# EAGLE board CT_schematic (EAGLE 7.6.0)

Size 100 x 80 mm. Coordinates in mm from the lower left corner, seen from the top.
Outline: 0,0 100,0 100,80 0,80 0,0
Copper layers (1*16): Top 0.035mm / dielectric 1.5mm / Bottom 0.035mm
Design rules "default": minimum track width 10mil, minimum drill 24mil, track to track 8mil, track to pad 8mil, pad to pad 8mil, via to via 8mil, smd to smd 8mil, copper to edge 40mil, drill to drill 8mil, minimum pad ring 10mil, minimum via ring 8mil, stop-mask expansion 4mil, vias tented up to drill 0mil, thermal gap 10mil

## Footprints (pad centres in the part's own frame; a part is rotated, then mirrored left to right if it is on the bottom)
C0603 = smd 0.8 x 0.8: 1 -0.762,0; 2 0.762,0
C0402 = smd 0.5 x 0.5: 1 -0.508,0; 2 0.508,0
C0805 = smd 1.2 x 1.3: 1 -1.016,0; 2 1.016,0
C1210 = smd 1.2 x 2.5: 1 -1.524,0; 2 1.524,0
2220 = smd 1.85 x 5.5: 1 -2.55,0; 2 2.55,0
EXV-9H = smd 3.505 x 1.676: 1 -2.857,0; 2 2.857,0
L0603 = smd 0.8 x 0.8: 1 -0.762,0; 2 0.762,0
R0603 = smd 0.8 x 0.8: 1 -0.762,0; 2 0.762,0
DR1040 = smd 1.6 x 3.2: 1 -4.458,0; 2 4.458,0
PJ-037B_PACKAGE = drill 3.7 square: 1 12,0 | drill 3.2 square: 2 6,0
LQFP144 = smd 0.35 x 1.35: 1 -8.75,-10.625; 2 -8.25,-10.625; 3 -7.75,-10.625; 4 -7.25,-10.625; 5 -6.75,-10.625; 6 -6.25,-10.625; 7 -5.75,-10.625; 8 -5.25,-10.625; 9 -4.75,-10.625; 10 -4.25,-10.625; 11 -3.75,-10.625; 12 -3.25,-10.625; 13 -2.75,-10.62; 14 -2.25,-10.625; 15 -1.75,-10.625; 16 -1.25,-10.625; 17 -0.75,-10.625; 18 -0.25,-10.625; 19 0.25,-10.625; 20 0.75,-10.625; 21 1.25,-10.625; 22 1.75,-10.625; 23 2.25,-10.625; 24 2.75,-10.62; 25 3.25,-10.625; 26 3.75,-10.625; 27 4.25,-10.625; 28 4.75,-10.625; 29 5.25,-10.625; 30 5.75,-10.625; 31 6.25,-10.625; 32 6.75,-10.625; 33 7.25,-10.625; 34 7.75,-10.625; 35 8.25,-10.625; 36 8.75,-10.625; 73 8.75,10.625; 74 8.25,10.625; 75 7.75,10.625; 76 7.25,10.625; 77 6.75,10.625; 78 6.25,10.625; 79 5.75,10.625; 80 5.25,10.625; 81 4.75,10.625; 82 4.25,10.625; 83 3.75,10.625; 84 3.25,10.625; 85 2.75,10.625; 86 2.25,10.625; 87 1.75,10.625; 88 1.25,10.625; 89 0.75,10.625; 90 0.25,10.625; 91 -0.25,10.625; 92 -0.75,10.625; 93 -1.25,10.625; 94 -1.75,10.625; 95 -2.25,10.625; 96 -2.75,10.625; 97 -3.25,10.625; 98 -3.75,10.625; 99 -4.25,10.625; 100 -4.75,10.625; 101 -5.25,10.625; 102 -5.75,10.625; 103 -6.25,10.625; 104 -6.75,10.625; 105 -7.25,10.625; 106 -7.75,10.625; 107 -8.25,10.625; 108 -8.75,10.625 | smd 1.35 x 0.35: 37 10.625,-8.75; 38 10.625,-8.25; 39 10.625,-7.75; 40 10.625,-7.25; 41 10.625,-6.75; 42 10.625,-6.25; 43 10.625,-5.75; 44 10.625,-5.25; 45 10.625,-4.75; 46 10.625,-4.25; 47 10.625,-3.75; 48 10.625,-3.25; 49 10.625,-2.75; 50 10.625,-2.25; 51 10.625,-1.75; 52 10.625,-1.25; 53 10.625,-0.75; 54 10.625,-0.25; 55 10.625,0.25; 56 10.625,0.75; 57 10.625,1.25; 58 10.625,1.75; 59 10.625,2.25; 60 10.625,2.75; 61 10.625,3.25; 62 10.625,3.75; 63 10.625,4.25; 64 10.625,4.75; 65 10.625,5.25; 66 10.625,5.75; 67 10.625,6.25; 68 10.625,6.75; 69 10.625,7.25; 70 10.625,7.75; 71 10.625,8.25; 72 10.625,8.75; 109 -10.625,8.75; 110 -10.625,8.25; 111 -10.625,7.75; 112 -10.625,7.25; 113 -10.625,6.75; 114 -10.625,6.25; 115 -10.625,5.75; 116 -10.625,5.25; 117 -10.625,4.75; 118 -10.625,4.25; 119 -10.625,3.75; 120 -10.625,3.25; 121 -10.625,2.75; 122 -10.625,2.25; 123 -10.625,1.75; 124 -10.625,1.25; 125 -10.625,0.75; 126 -10.625,0.25; 127 -10.625,-0.25; 128 -10.625,-0.75; 129 -10.625,-1.25; 130 -10.625,-1.75; 131 -10.625,-2.25; 132 -10.625,-2.75; 133 -10.625,-3.25; 134 -10.625,-3.75; 135 -10.625,-4.25; 136 -10.625,-4.75; 137 -10.625,-5.25; 138 -10.625,-5.75; 139 -10.625,-6.25; 140 -10.625,-6.75; 141 -10.625,-7.25; 142 -10.625,-7.75; 143 -10.625,-8.25; 144 -10.625,-8.75
SOT-23-6 = smd 1.1 x 0.6: 1 -1.4,0.95; 2 -1.4,0; 3 -1.4,-0.95; 4 1.4,-0.95; 5 1.4,0; 6 1.4,0.95
ARDUCAM = drill 1 pad 1.8 square: 1 0,0 | drill 1 pad 1.8: 2 0,2.54; 3 2.54,0; 4 2.54,2.54; 5 5.08,0; 6 5.08,2.54; 7 7.62,0; 8 7.62,2.54; 9 10.16,0; 10 10.16,2.54; 11 12.7,0; 12 12.7,2.54; 13 15.24,0; 14 15.24,2.54; 15 17.78,0; 16 17.78,2.54; 17 20.32,0; 18 20.32,2.54; 19 22.86,0; 20 22.86,2.54
QFN-32 = smd 0.6 x 0.3: 1 -2.3,1.75; 2 -2.3,1.25; 3 -2.3,0.75; 4 -2.3,0.25; 5 -2.3,-0.25; 6 -2.3,-0.75; 7 -2.3,-1.25; 8 -2.3,-1.75; 17 2.3,-1.75; 18 2.3,-1.25; 19 2.3,-0.75; 20 2.3,-0.25; 21 2.3,0.25; 22 2.3,0.75; 23 2.3,1.25; 24 2.3,1.75 | smd 0.3 x 0.6: 9 -1.75,-2.3; 10 -1.25,-2.3; 11 -0.75,-2.3; 12 -0.25,-2.3; 13 0.25,-2.3; 14 0.75,-2.3; 15 1.25,-2.3; 16 1.75,-2.3; 25 1.75,2.3; 26 1.25,2.3; 27 0.75,2.3; 28 0.25,2.3; 29 -0.25,2.3; 30 -0.75,2.3; 31 -1.25,2.3; 32 -1.75,2.3 | smd 3.2 x 3.2: EXP 0,0
7498011122R = smd 0.71 x 2.29: 1 -3.545,-3.18; 2 -2.525,-3.18; 3 -1.505,-3.18; 4 -0.485,-3.18; 5 0.535,-3.18; 6 1.555,-3.18; 8 3.595,-3.18; 9 5.635,-3.18; 10 6.655,-3.18; 11 -6.605,-3.18; 12 -5.585,-3.18 | smd 1.4 x 2.54: 13 -8.51,10.2; 14 8.51,10.2 | hole 1.4: -3.5,0; 3.5,0
DFN8-S = smd 0.6 x 0.4: 1 -2.69,1.905; 2 -2.69,0.635; 3 -2.69,-0.635; 4 -2.69,-1.905; 5 2.69,-1.905; 6 2.69,-0.635; 7 2.69,0.635; 8 2.69,1.905
USB-A-H = drill 0.914: 1 2.718,3.493; 2 2.718,1.003; 3 2.718,-1.003; 4 2.718,-3.493 | drill 2.311: 5 0,-6.566; 6 0,6.566
SOT143B = smd 1 x 0.7: 1 -0.75,-1 | smd 0.6 x 0.7: 2 0.95,-1; 3 0.95,1; 4 -0.95,1
QFN-28 = smd 0.813 x 0.305: 1 -2.451,1.5; 2 -2.451,1; 3 -2.451,0.5; 4 -2.451,0; 5 -2.451,-0.5; 6 -2.451,-1; 7 -2.451,-1.5; 15 2.451,-1.5; 16 2.451,-1; 17 2.451,-0.5; 18 2.451,0; 19 2.451,0.5; 20 2.451,1; 21 2.451,1.5 | smd 0.305 x 0.813: 8 -1.5,-2.451; 9 -1,-2.451; 10 -0.5,-2.451; 11 0,-2.451; 12 0.5,-2.451; 13 1,-2.451; 14 1.5,-2.451; 22 1.5,2.451; 23 1,2.451; 24 0.5,2.451; 25 0,2.451; 26 -0.5,2.451; 27 -1,2.451; 28 -1.5,2.451 | smd 3.607 x 3.607: 29 0,0
SJ-43515TS-SMT-TR = smd 2.2 x 3: 1 0.6,-7.4; 4 3.4,-7.4 | smd 3 x 3: 2 12.8,-7.4; 5 17,-3 | smd 2 x 3: 3 5.3,0; 6 2.5,0 | drill 1.8: P$7 4.5,-3.69; P$8 11.54,-3.69
ABLS-25.000MHZ-B2F-T = smd 5.6 x 2.8: 1 -3.81,0; 2 5.69,0
ASEK = smd 1.4 x 1: 1 -1.1,-0.8; 2 1.1,-0.8; 3 1.1,0.8; 4 -1.1,0.8
ASFL1 = smd 1.7 x 1.5: 1 -1.27,-1.1; 2 1.27,-1.1; 3 1.27,1.1; 4 -1.27,1.1
IDT74FCT38072 = smd 0.51 x 1: 1 0,0; 2 1.27,0; 3 2.54,0; 4 3.81,0; 5 3.81,4.95; 6 2.54,4.95; 7 1.27,4.95; 8 0,4.95
QFN-16_EP = smd 0.805 x 0.3: 1 -1.452,0.75; 2 -1.452,0.25; 3 -1.452,-0.25; 4 -1.452,-0.75; 9 1.452,-0.75; 10 1.452,-0.25; 11 1.452,0.25; 12 1.452,0.75 | smd 0.3 x 0.805: 5 -0.75,-1.452; 6 -0.25,-1.452; 7 0.25,-1.452; 8 0.75,-1.452; 13 0.75,1.452; 14 0.25,1.452; 15 -0.25,1.452; 16 -0.75,1.452 | smd 1.55 x 1.55: 17 0,0
WSON-8 = smd 0.3 x 0.6: 1 -0.75,0; 2 0.05,0; 3 0.85,0; 4 1.65,0; 5 1.65,3.8; 6 0.85,3.8; 7 0.05,3.8; 8 -0.75,3.8 | smd 3 x 2.6: PAD 0.45,1.9
SON-6 = smd 0.55 x 0.3: 1 -0.355,0.5 | smd 0.52 x 0.3: 2 -0.37,0; 3 -0.37,-0.5; 4 0.37,-0.5; 5 0.37,0; 6 0.37,0.5
SW_4-1437565-2 = smd 1.4 x 2.1: 1 -2.23,4.55; 2 -2.23,-4.55; 3 2.23,4.55; 4 2.23,-4.55
LGM67K-G1J2-24-Z = smd 0.8 x 1.4: A -2,0; C 0,0
NC7SZ125M5X = smd 1.3 x 0.7: 1 -1.3,0.95; 2 -1.3,0; 3 -1.3,-0.95; 4 1.3,-0.95; 5 1.3,0.95

## Placement (x,y rotation side)
C1  1e-06  [C0603]  -19.05,93.98 0 top  (outside the outline)
C2  1e-07  [C0603]  -22.86,93.98 0 top  (outside the outline)
C3  1e-07  [C0603]  -26.67,93.98 0 top  (outside the outline)
C4  1e-07  [C0603]  -30.48,93.98 0 top  (outside the outline)
C5  1e-07  [C0603]  -34.29,93.98 0 top  (outside the outline)
C6  1e-07  [C0603]  -38.1,93.98 0 top  (outside the outline)
C7  1e-07  [C0603]  -41.91,93.98 0 top  (outside the outline)
C8  1e-07  [C0603]  -45.72,93.98 0 top  (outside the outline)
C9  1e-07  [C0603]  -49.53,93.98 0 top  (outside the outline)
C10  1e-07  [C0603]  -53.34,93.98 0 top  (outside the outline)
C11  1e-07  [C0603]  -57.15,93.98 0 top  (outside the outline)
C12  1e-07  [C0603]  -60.96,93.98 0 top  (outside the outline)
C13  1e-07  [C0603]  -64.77,93.98 0 top  (outside the outline)
C14  4.7e-06  [C0603]  -85.09,88.9 0 top  (outside the outline)
C15  2.2e-09  [C0603]  -88.9,88.9 0 top  (outside the outline)
C16  2.2e-09  [C0603]  -92.71,88.9 0 top  (outside the outline)
C17  1e-08  [C0603]  -68.58,93.98 0 top  (outside the outline)
C18  1e-06  [C0603]  -72.39,93.98 0 top  (outside the outline)
C19  1e-11  [C0402]  -30.48,104.14 0 top  (outside the outline)
C20  1e-11  [C0402]  -34.29,104.14 0 top  (outside the outline)
C21  1e-06  [C0603]  -76.2,93.98 0 top  (outside the outline)
C22  1e-07  [C0402]  -38.1,104.14 0 top  (outside the outline)
C23  1e-07  [C0402]  -41.91,104.14 0 top  (outside the outline)
C24  2.2e-06  [C0603]  -15.24,93.98 0 top  (outside the outline)
C25  1e-07  [C0402]  -45.72,104.14 0 top  (outside the outline)
C26  1e-07  [C0402]  -49.53,104.14 0 top  (outside the outline)
C27  1e-05  [C0805]  -34.29,83.82 0 top  (outside the outline)
C28  1e-07  [C0402]  -53.34,104.14 0 top  (outside the outline)
C29  1e-08  [C0402]  -57.15,104.14 0 top  (outside the outline)
C30  2.2e-05  [C1210]  -68.58,76.2 0 top  (outside the outline)
C31  2.2e-05  [C1210]  -74.93,76.2 0 top  (outside the outline)
C32  1e-09  [C0402]  -60.96,104.14 0 top  (outside the outline)
C33  1e-09  [C0402]  -64.77,104.14 0 top  (outside the outline)
C34  1e-07  [C0402]  -68.58,104.14 0 top  (outside the outline)
C35  1e-07  [C0402]  -72.39,104.14 0 top  (outside the outline)
C36  1e-07  [C0402]  -76.2,104.14 0 top  (outside the outline)
C37  1e-07  [C0402]  -80.01,104.14 0 top  (outside the outline)
C38  1e-07  [C0402]  -83.82,104.14 0 top  (outside the outline)
C39  1e-05  [C0805]  -39.37,83.82 0 top  (outside the outline)
C40  1e-05  [C0805]  -44.45,83.82 0 top  (outside the outline)
C41  1e-05  [C0805]  -49.53,83.82 0 top  (outside the outline)
C42  1e-05  [C0805]  -54.61,83.82 0 top  (outside the outline)
C43  1e-05  [C0805]  -59.69,83.82 0 top  (outside the outline)
C44  1e-08  [C0402]  -87.63,104.14 0 top  (outside the outline)
C45  1e-08  [C0402]  -91.44,104.14 0 top  (outside the outline)
C46  1e-08  [C0402]  -95.25,104.14 0 top  (outside the outline)
C47  1e-08  [C0402]  -15.24,109.22 0 top  (outside the outline)
C48  1e-08  [C0402]  -19.05,109.22 0 top  (outside the outline)
C49  1e-05  [C0805]  -64.77,83.82 0 top  (outside the outline)
C50  1e-06  [C0603]  -80.01,93.98 0 top  (outside the outline)
C51  1e-07  [C0402]  -22.86,109.22 0 top  (outside the outline)
C52  6.8e-05  [2220]  -77.47,48.26 0 top  (outside the outline)
C53  1e-08  [C0402]  -26.67,109.22 0 top  (outside the outline)
C54  1e-05  [C1210]  -81.28,76.2 0 top  (outside the outline)
C55  1e-05  [C1210]  -87.63,76.2 0 top  (outside the outline)
C56  1e-07  [C0402]  -30.48,109.22 0 top  (outside the outline)
C57  0.0001  [EXV-9H]  -55.88,68.58 0 top  (outside the outline)
C58  0.0001  [EXV-9H]  -67.31,68.58 0 top  (outside the outline)
C59  1e-08  [C0402]  -34.29,109.22 0 top  (outside the outline)
C60  1e-08  [C0402]  -38.1,109.22 0 top  (outside the outline)
C61  1e-08  [C0402]  -41.91,109.22 0 top  (outside the outline)
F1  240.0  [L0603]  -83.82,93.98 0 top  (outside the outline)
I1  97.0  [R0603]  -87.63,93.98 0 top  (outside the outline)
I5  7e-06  [DR1040]  -38.1,48.26 0 top  (outside the outline)
J1  PJ-037B  [PJ-037B_PACKAGE]  -83.82,35.56 0 top  (outside the outline)
R2  1000.0  [R0603]  -91.44,93.98 0 top  (outside the outline)
R4  4700.0  [R0603]  -95.25,93.98 0 top  (outside the outline)
R5  4700.0  [R0603]  -15.24,99.06 0 top  (outside the outline)
R6  4700.0  [R0603]  -19.05,99.06 0 top  (outside the outline)
R7  2200.0  [R0603]  -22.86,99.06 0 top  (outside the outline)
R8  2200.0  [R0603]  -26.67,99.06 0 top  (outside the outline)
R11  47000.0  [R0603]  -90.17,82.55 0 top  (outside the outline)
R12  10000.0  [R0603]  -95.25,82.55 0 top  (outside the outline)
R13  10000.0  [R0603]  -15.24,88.9 0 top  (outside the outline)
R14  10000.0  [R0603]  -20.32,88.9 0 top  (outside the outline)
R15  1270.0  [R0603]  -30.48,99.06 0 top  (outside the outline)
R16  10000.0  [R0603]  -25.4,88.9 0 top  (outside the outline)
R17  10000.0  [R0603]  -30.48,88.9 0 top  (outside the outline)
R18  0.1  [R0603]  -34.29,99.06 0 top  (outside the outline)
R19  0.1  [R0603]  -38.1,99.06 0 top  (outside the outline)
R20  200.0  [R0603]  -41.91,99.06 0 top  (outside the outline)
R21  220.0  [R0603]  -45.72,99.06 0 top  (outside the outline)
R22  6490.0  [R0603]  -49.53,99.06 0 top  (outside the outline)
R23  4700.0  [R0603]  -53.34,99.06 0 top  (outside the outline)
R24  4700.0  [R0603]  -57.15,99.06 0 top  (outside the outline)
R25  4700.0  [R0603]  -60.96,99.06 0 top  (outside the outline)
R26  4700.0  [R0603]  -64.77,99.06 0 top  (outside the outline)
R27  1000.0  [R0603]  -68.58,99.06 0 top  (outside the outline)
R28  4700.0  [R0603]  -72.39,99.06 0 top  (outside the outline)
R29  1000.0  [R0603]  -76.2,99.06 0 top  (outside the outline)
R30  1000.0  [R0603]  -80.01,99.06 0 top  (outside the outline)
R31  4700.0  [R0603]  -83.82,99.06 0 top  (outside the outline)
R32  4700.0  [R0603]  -87.63,99.06 0 top  (outside the outline)
R33  10000.0  [R0603]  -35.56,88.9 0 top  (outside the outline)
R34  10000.0  [R0603]  -40.64,88.9 0 top  (outside the outline)
R35  10000.0  [R0603]  -45.72,88.9 0 top  (outside the outline)
R36  47000.0  [R0603]  -50.8,88.9 0 top  (outside the outline)
R37  47000.0  [R0603]  -55.88,88.9 0 top  (outside the outline)
R38  47000.0  [R0603]  -60.96,88.9 0 top  (outside the outline)
R39  680.0  [R0603]  -91.44,99.06 0 top  (outside the outline)
R40  20000.0  [R0603]  -66.04,88.9 0 top  (outside the outline)
R41  91000.0  [R0603]  -71.12,88.9 0 top  (outside the outline)
R42  300000.0  [R0603]  -69.85,82.55 0 top  (outside the outline)
R43  100000.0  [R0603]  -74.93,82.55 0 top  (outside the outline)
R44  3900.0  [R0603]  -95.25,99.06 0 top  (outside the outline)
R45  1000.0  [R0603]  -15.24,104.14 0 top  (outside the outline)
R46  10000.0  [R0603]  -76.2,88.9 0 top  (outside the outline)
R47  10000.0  [R0603]  -81.28,88.9 0 top  (outside the outline)
R48  9100.0  [R0603]  -19.05,104.14 0 top  (outside the outline)
R49  680000.0  [R0603]  -80.01,82.55 0 top  (outside the outline)
R50  120000.0  [R0603]  -85.09,82.55 0 top  (outside the outline)
U1  STM32F429ZET6  [LQFP144]  -44.45,11.43 0 top  (outside the outline)
U2  MAX4995AAUT+T  [SOT-23-6]  -92.71,74.93 0 top  (outside the outline)
U3  arducam_ov2640  [ARDUCAM]  -40.64,74.93 0 top  (outside the outline)
U4  KSZ8081RNBIA-TR  [QFN-32]  -68.58,48.26 0 top  (outside the outline)
U5  7498011122R  [7498011122R]  -22.86,7.62 0 top  (outside the outline)
U6  24AA256-I/MF  [DFN8-S]  -53.34,48.26 0 top  (outside the outline)
U7  61400416021  [USB-A-H]  -62.23,8.89 0 top  (outside the outline)
U8  prtr5v0u2ax  [SOT143B]  -54.61,109.22 0 top  (outside the outline)
U9  WM8731CLSEFL  [QFN-28]  -60.96,77.47 0 top  (outside the outline)
U10  SJ-43515TS-SMT-TR  [SJ-43515TS-SMT-TR]  -39.37,38.1 0 top  (outside the outline)
U11  SJ-43515TS-SMT-TR  [SJ-43515TS-SMT-TR]  -67.31,38.1 0 top  (outside the outline)
U12  ABLS-25.000MHZ-B2F-T  [ABLS-25.000MHZ-B2F-T]  -86.36,68.58 0 top  (outside the outline)
U13  ASEK-32.768KHz-ECST  [ASEK]  -46.99,68.58 0 top  (outside the outline)
U14  ASFL1-12.288MHZ-EC-T  [ASFL1]  -50.8,59.69 0 top  (outside the outline)
U15  ASFL1-25MHZ-NCS  [ASFL1]  -67.31,59.69 0 top  (outside the outline)
U16  ASFL1-50MHZ-NCS  [ASFL1]  -83.82,59.69 0 top  (outside the outline)
U17  idt74fct38072  [IDT74FCT38072]  -29.21,66.04 0 top  (outside the outline)
U18  LTC3601EUD#PBF  [QFN-16_EP]  -24.13,104.14 0 top  (outside the outline)
U19  LP3878SDX-ADJ/NOPB  [WSON-8]  -30.48,58.42 0 top  (outside the outline)
U20  TPS3895ADRYR  [SON-6]  -58.42,107.95 0 top  (outside the outline)
U21  4-1437565-2  [SW_4-1437565-2]  -27.94,49.53 0 top  (outside the outline)
U22  Q65110A2395  [LGM67K-G1J2-24-Z]  -48.26,76.2 0 top  (outside the outline)
U23  nc7sz125m5x  [NC7SZ125M5X]  -15.24,82.55 0 top  (outside the outline)
U24  nc7sz125m5x  [NC7SZ125M5X]  -21.59,82.55 0 top  (outside the outline)
U25  nc7sz125m5x  [NC7SZ125M5X]  -27.94,82.55 0 top  (outside the outline)

## Library data of the parts
C1-C61 F1 I1 I5 J1 R2 R4-R8 R11-R50 U1-U25 = circuit_tree

## Nets
CLK_CRYSTAL_U1_23: C19.1 U1.23 U12.1
CLK_CRYSTAL_U1_24: C20.1 U1.24 U12.2
CLK_U1_8: U1.8 U13.3
CLK_U1_35: U1.35 U17.7
CLK_U3_8: U3.8 U15.3
CLK_U4_9: U4.9 U17.6
CLK_U9_1: U9.1 U14.3
CLK_U17_3: U16.3 U17.3
GND: C1.2 C2.2 C3.2 C4.2 C5.2 C6.2 C7.2 C8.2 C9.2 C10.2 C11.2 C12.2 C13.2 C14.2 C15.2 C16.2 C17.2 C18.2 C19.2 C20.2 C21.2 C22.2 C23.2 C24.2 C25.2 C26.2 C27.2 C28.2 C29.2 C33.2 C34.2 C35.2 C36.2 C37.2 C38.2 C39.2 C40.2 C41.2 C42.2 C43.2 C44.2 C45.2 C46.2 C47.2 C48.2 C49.2 C50.2 C52.1 C52.2 C53.2 C54.2 C55.2 C56.2 C57.2 C58.2 C59.2 C60.2 C61.2 J1.2 R2.2 R11.2 R14.2 R15.2 R17.2 R18.2 R19.2 R22.2 R24.2 R27.2 R29.2 R30.2 R33.2 R36.2 R37.2 R38.2 R40.2 R42.2 R45.2 R48.2 R50.2 U1.16 U1.31 U1.38 U1.51 U1.61 U1.83 U1.94 U1.107 U1.120 U1.130 U2.2 U3.2 U3.20 U4.1 U4.EXP U5.1 U5.10 U6.4 U7.4 U7.5 U7.6 U8.1 U9.4 U9.15 U9.19 U9.25 U9.26 U9.29 U10.1 U11.1 U13.2 U14.2 U15.2 U16.2 U17.4 U17.5 U17.8 U18.1 U18.9 U18.17 U19.3 U19.PAD U20.2 U22.C U23.1 U23.3 U24.1 U24.3 U25.1 U25.3
NET_U1_25: R5.1 U1.25 U24.4
NET_U1_27: U4.12
NET_U1_33: C17.1 C18.1 F1.1 U1.32 U1.33
NET_U1_36: U4.11
NET_U1_48: R14.1 U1.48
NET_U1_71: C15.1 U1.71
NET_U1_102: R15.1 U1.102
NET_U1_106: C16.1 U1.106
NET_U1_136: R7.1 U1.136 U6.6
NET_U1_137: R8.1 U1.137 U6.5
NET_U1_138: R13.1 U1.138
NET_U1_141: U22.A
NET_U1_142: U21.3 U21.4
NET_U1_143: R12.1 U1.143
NET_U2_3: R11.1 U2.3
NET_U3_19: R6.1 U3.19 U25.4
NET_U4_2: C24.1 C25.1 U4.2
NET_U4_3: C26.1 I1.1 U4.3
NET_U4_10: R22.1 U4.10
NET_U4_13: R25.1 U4.13
NET_U4_14: R26.1 U4.14
NET_U4_19: R24.1 U4.19
NET_U4_20: R30.1 U4.20
NET_U4_21: R23.1 U4.21
NET_U4_28: R28.1 U4.28
NET_U4_29: R29.1 U4.29
NET_U4_31: R31.1 U4.31
NET_U4_32: R4.1 U4.32 U23.4
NET_U5_1: U4.7 U5.1
NET_U5_2: C22.1 U5.2
NET_U5_3: U4.6 U5.3
NET_U5_4: U4.5 U5.4
NET_U5_5: C23.1 U5.5
NET_U5_6: U4.4 U5.6
NET_U5_8: R19.1 U5.8
NET_U5_9: R20.1 U5.9
NET_U5_12: R21.1 U5.12
NET_U5_13: R18.1 U5.13 U5.14
NET_U5_30: R20.2
NET_U5_31: R21.2
NET_U6_1: R33.1 U6.1
NET_U6_2: R34.1 U6.2
NET_U6_3: R35.1 U6.3
NET_U9_9: U9.9
NET_U9_20: C38.1 C43.1 U9.20
NET_U10_2: C31.1 R37.1 U10.2
NET_U10_5: C30.1 R36.1 U10.5
NET_U10_13: C30.2
NET_U10_14: C31.2
NET_U11_5: C32.1 C33.1 R38.1 R39.1 U11.5
NET_U11_21: R39.2
NET_U11_22: C32.2
NET_U18_3: C51.2 I5.1 U18.3 U18.4
NET_U18_6: C51.1 U18.6
NET_U18_7: C50.1 U18.7 U18.12
NET_U18_10: R42.1 U18.10
NET_U18_11: R40.1 R41.1 U18.11
NET_U18_14: U18.14
NET_U18_ATNET_3: I5.2 R41.2
NET_U19_1: C53.1 U19.1
NET_U19_6: R44.2 R45.1 U19.6
NET_U19_8: R43.1 U19.8
NET_U20_1: R47.1 R48.1 U20.1
NET_U20_3: R49.2 R50.1 U20.3
NET_U20_4: R46.1 U20.4 U23.2 U24.2 U25.2
NET_U21_1: R2.1 U21.1 U21.2
PROC_DCMI_D0: U1.96 U3.18
PROC_DCMI_D1: U1.97 U3.17
PROC_DCMI_D2: U1.98 U3.16
PROC_DCMI_D3: U1.99 U3.15
PROC_DCMI_D4: U1.3 U3.14
PROC_DCMI_D5: U1.117 U3.13
PROC_DCMI_D6: U1.4 U3.12
PROC_DCMI_D7: U1.5 U3.11
PROC_DCMI_D8: U1.111 U3.10
PROC_DCMI_D9: U1.113 U3.9
PROC_DCMI_HSYNC: U1.40 U3.6
PROC_DCMI_PIXCK: U1.42 U3.7
PROC_DCMI_VSYNC: U1.124 U3.5
PROC_ETH_CRS_DV: U4.18
PROC_ETH_RXD0: R32.1 U4.16
PROC_ETH_RXD1: R27.1 U4.15
PROC_ETH_TX_EN: U4.23
PROC_ETH_TXD0: U4.24
PROC_ETH_TXD1: U4.25
PROC_GPIO_TO_U1_USB_FAULT: R16.1 U1.2 U2.6
PROC_GPIO_TO_U1_VBUS_EN: R17.1 U1.1 U2.4
PROC_I2S2_CK: U1.69 U9.7
PROC_I2S2_EXT_SD: U1.28 U9.10
PROC_I2S2_SD: U1.29 U9.8
PROC_I2S2_WS: U1.140 U9.9 U9.11
PROC_USB_OTG_FS_DM: U1.103 U7.2 U8.3
PROC_USB_OTG_FS_DP: U1.104 U7.3 U8.2
PROC_USB_OTG_FS_VBUS: U1.101 U2.1 U7.1 U8.4
VCC_S1_14V9: C49.1 C54.1 C57.1 C58.1 J1.1 R43.2 U18.15 U18.16 U19.4
VCC_TIER1_3V3: C1.1 C2.1 C3.1 C4.1 C5.1 C6.1 C7.1 C8.1 C9.1 C10.1 C11.1 C12.1 C13.1 C14.1 C21.1 C27.1 C28.1 C29.1 C34.1 C35.1 C36.1 C37.1 C39.1 C40.1 C41.1 C42.1 C44.1 C45.1 C46.1 C47.1 C48.1 C52.2 C56.1 C59.1 C60.1 C61.1 F1.2 I1.2 I5.2 R4.2 R5.2 R6.2 R7.2 R8.2 R12.2 R13.2 R16.2 R23.2 R25.2 R26.2 R28.2 R31.2 R32.2 R34.2 R35.2 R41.2 R46.2 R47.2 R49.1 U1.6 U1.17 U1.30 U1.39 U1.52 U1.62 U1.72 U1.84 U1.95 U1.108 U1.121 U1.131 U1.144 U3.1 U4.17 U6.7 U6.8 U9.3 U9.5 U9.12 U9.18 U13.4 U14.4 U15.4 U16.4 U17.1 U17.2 U18.8 U20.6 U23.5 U24.5 U25.5
VCC_TIER1_5V0: C55.1 R44.1 U2.5 U19.5

## Tracks (layer width: path | path; a pad name or v marks a point on that pad's centre or on a via)
CLK_CRYSTAL_U1_23  (2 unrouted)
CLK_CRYSTAL_U1_24  (2 unrouted)
CLK_U1_8  (1 unrouted)
CLK_U1_35  (1 unrouted)
CLK_U3_8  (1 unrouted)
CLK_U4_9  (1 unrouted)
CLK_U9_1  (1 unrouted)
CLK_U17_3  (1 unrouted)
GND  (129 unrouted)
NET_U1_25  (2 unrouted)
NET_U1_33  (4 unrouted)
NET_U1_48  (1 unrouted)
NET_U1_71  (1 unrouted)
NET_U1_102  (1 unrouted)
NET_U1_106  (1 unrouted)
NET_U1_136  (2 unrouted)
NET_U1_137  (2 unrouted)
NET_U1_138  (1 unrouted)
NET_U1_142  (1 unrouted)
NET_U1_143  (1 unrouted)
NET_U2_3  (1 unrouted)
NET_U3_19  (2 unrouted)
NET_U4_2  (2 unrouted)
NET_U4_3  (2 unrouted)
NET_U4_10  (1 unrouted)
NET_U4_13  (1 unrouted)
NET_U4_14  (1 unrouted)
NET_U4_19  (1 unrouted)
NET_U4_20  (1 unrouted)
NET_U4_21  (1 unrouted)
NET_U4_28  (1 unrouted)
NET_U4_29  (1 unrouted)
NET_U4_31  (1 unrouted)
NET_U4_32  (2 unrouted)
NET_U5_1  (1 unrouted)
NET_U5_2  (1 unrouted)
NET_U5_3  (1 unrouted)
NET_U5_4  (1 unrouted)
NET_U5_5  (1 unrouted)
NET_U5_6  (1 unrouted)
NET_U5_8  (1 unrouted)
NET_U5_9  (1 unrouted)
NET_U5_12  (1 unrouted)
NET_U5_13  (2 unrouted)
NET_U6_1  (1 unrouted)
NET_U6_2  (1 unrouted)
NET_U6_3  (1 unrouted)
NET_U9_20  (2 unrouted)
NET_U10_2  (2 unrouted)
NET_U10_5  (2 unrouted)
NET_U11_5  (4 unrouted)
NET_U18_3  (3 unrouted)
NET_U18_6  (1 unrouted)
NET_U18_7  (2 unrouted)
NET_U18_10  (1 unrouted)
NET_U18_11  (2 unrouted)
NET_U18_ATNET_3  (1 unrouted)
NET_U19_1  (1 unrouted)
NET_U19_6  (2 unrouted)
NET_U19_8  (1 unrouted)
NET_U20_1  (2 unrouted)
NET_U20_3  (2 unrouted)
NET_U20_4  (4 unrouted)
NET_U21_1  (2 unrouted)
PROC_DCMI_D0  (1 unrouted)
PROC_DCMI_D1  (1 unrouted)
PROC_DCMI_D2  (1 unrouted)
PROC_DCMI_D3  (1 unrouted)
PROC_DCMI_D4  (1 unrouted)
PROC_DCMI_D5  (1 unrouted)
PROC_DCMI_D6  (1 unrouted)
PROC_DCMI_D7  (1 unrouted)
PROC_DCMI_D8  (1 unrouted)
PROC_DCMI_D9  (1 unrouted)
PROC_DCMI_HSYNC  (1 unrouted)
PROC_DCMI_PIXCK  (1 unrouted)
PROC_DCMI_VSYNC  (1 unrouted)
PROC_ETH_RXD0  (1 unrouted)
PROC_ETH_RXD1  (1 unrouted)
PROC_GPIO_TO_U1_USB_FAULT  (2 unrouted)
PROC_GPIO_TO_U1_VBUS_EN  (2 unrouted)
PROC_I2S2_CK  (1 unrouted)
PROC_I2S2_EXT_SD  (1 unrouted)
PROC_I2S2_SD  (1 unrouted)
PROC_I2S2_WS  (2 unrouted)
PROC_USB_OTG_FS_DM  (2 unrouted)
PROC_USB_OTG_FS_DP  (2 unrouted)
PROC_USB_OTG_FS_VBUS  (3 unrouted)
VCC_S1_14V9  (8 unrouted)
VCC_TIER1_3V3  (90 unrouted)
VCC_TIER1_5V0  (3 unrouted)